# EAGLE board eCog_Buses_Template (EAGLE 6.6.0)
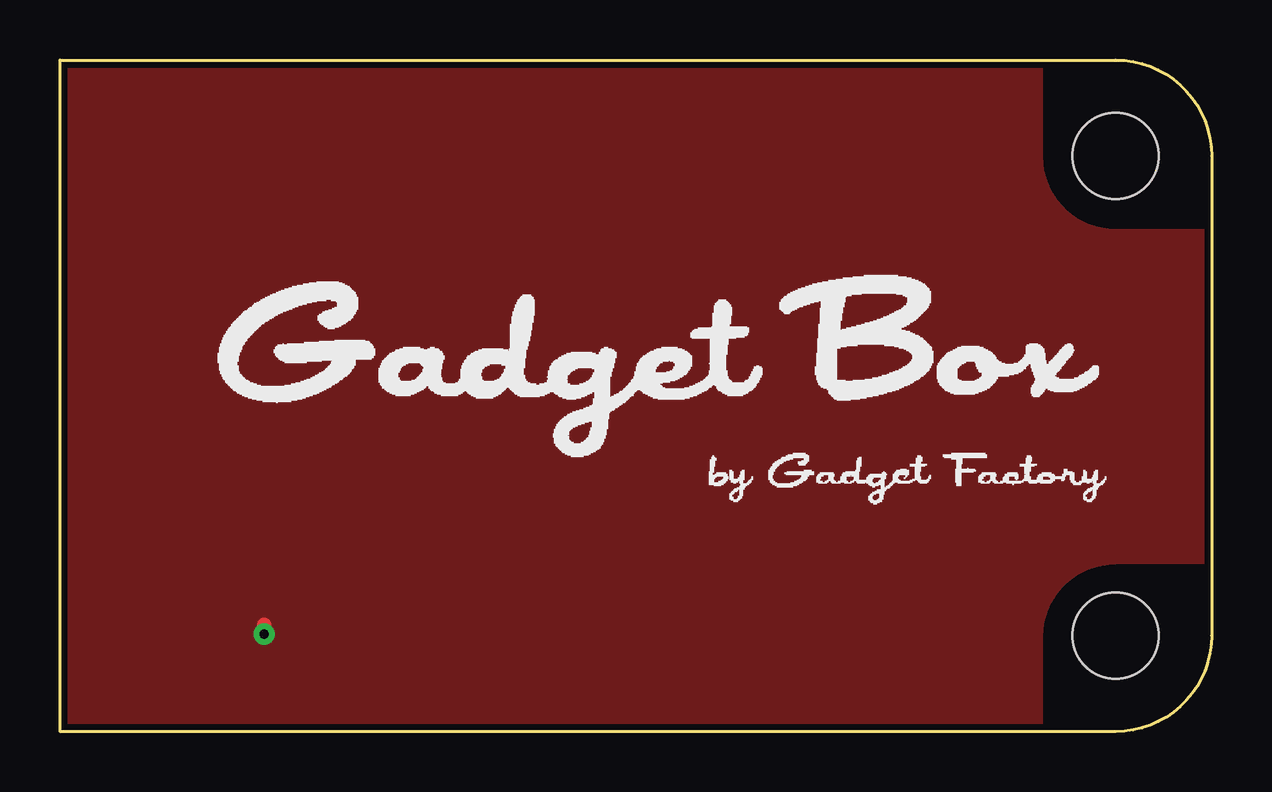
[diagram p0: board, top side]
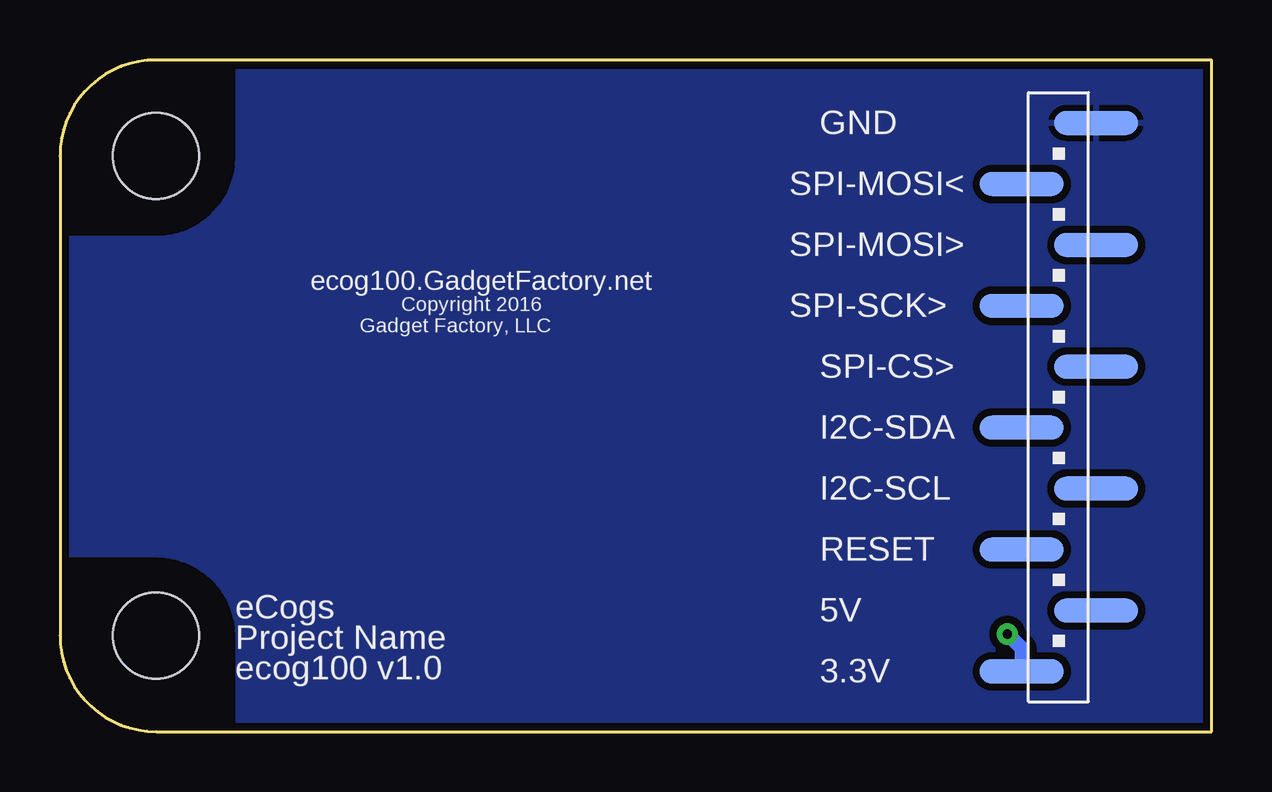
[diagram p1: board, bottom side, seen from below]

Size 48 x 28 mm. Coordinates in mm from the lower left corner, seen from the top.
Copper layers (1*16): Top 0.035mm / dielectric 1.5mm / Bottom 0.035mm
Design rules "SparkFun": minimum track width 8mil, minimum drill 20mil, track to track 8mil, track to pad 8mil, pad to pad 8mil, via to via 8mil, smd to smd 8mil, copper to edge 10mil, drill to drill 8mil, minimum pad ring 12mil, minimum via ring 10mil, stop-mask expansion 4mil, vias tented up to drill 25mil, thermal gap 10mil

## Footprints (pad centres in the part's own frame; a part is rotated, then mirrored left to right if it is on the bottom)
ECOG_BUSES_SMD = smd 3.5 x 1 bottom: 3V3 7.909,2.51; 5V0 4.811,5.05; GND 4.811,25.37; I2C-SCL 4.811,10.13; I2C-SDA 7.909,12.67; RESET 7.909,7.59; SPI-CS 4.811,15.21; SPI-MISO 7.909,22.83; SPI-MOSI 4.811,20.29; SPI-SCK 7.909,17.75 | hole 3.6: 44,4; 44,24

## Placement (x,y rotation side)
ECOG  ECOG_BUSES_ROWECOG_BUSES_SMD  [ECOG_BUSES_SMD]  0,0 0 top
U$1  [GADGETBOX_TEXT]  25.4,15.24 0 top

## Library data of the parts
ECOG = eCogs
U$1 = GadgetFactory

## Nets
3V3: ECOG.3V3
GND: ECOG.GND

## Tracks (layer width: path | path; a pad name or v marks a point on that pad's centre or on a via)
3V3  (via drill 0.38)
  Top 0.61: v8.51,4.06 8.51,4.45
  Bottom 0.61: ECOG.3V3 7.91,3.46 v8.51,4.06
  pour Top: -1,29 49,29 49,-1 -1,-1
GND
  pour Bottom (isolate 0.305): -2,30 50,30 50,-2 -2,-2

## Text on the board
bPlace: GND | SPI-MOSI< | SPI-MOSI> | Copyright 2016 | ecog100.GadgetFactory.net | SPI-SCK> | Gadget Factory, LLC | SPI-CS> | I2C-SDA | I2C-SCL | RESET | 5V | eCogs | Project Name | 3.3V | ecog100 v1.0